# EAGLE board Ex Controller ExPwr USB Host (EAGLE 7.4.0)

Size 27 x 34 mm. Coordinates in mm from the lower left corner, seen from the top.
Outline: 0,0 27,0 27,34 0,34 0,0
Copper layers (1*16): Top 0.035mm / dielectric 1.5mm / Bottom 0.035mm
Design rules "default": minimum track width 10mil, minimum drill 24mil, track to track 8mil, track to pad 8mil, pad to pad 8mil, via to via 8mil, smd to smd 8mil, copper to edge 40mil, drill to drill 8mil, minimum pad ring 10mil, minimum via ring 8mil, stop-mask expansion 4mil, vias tented up to drill 0mil, thermal gap 10mil

## Footprints (pad centres in the part's own frame; a part is rotated, then mirrored left to right if it is on the bottom)
USB-FEMALE-A-PTH = drill 0.9: D+ 5.9,1.3; D- 7.9,1.3; GND 3.4,1.3; VBUS 10.4,1.3 | drill 3: GND@1 13.5,4; GND@2 0.3,4
1X02 = drill 1.016 long: 1 -1.27,0; 2 1.27,0
SOLDERJUMPER_REFLOW = smd 1.168 x 1.6: 1 -0.762,0; 2 0.762,0
1X10-BIG = drill 1.016 pad 1.778 octagon: 1 -11.43,0; 2 -8.89,0; 3 -6.35,0; 4 -3.81,0; 5 -1.27,0; 6 1.27,0; 7 3.81,0; 8 6.35,0; 9 8.89,0; 10 11.43,0
R0805 = smd 1.1 x 1.4: 1 -1,0; 2 1,0
SOT23-BEC = smd 1 x 1.4: B -0.95,-1.1; C 0,1.1; E 0.95,-1.1

## Placement (x,y rotation side)
EX_DEV_1  USB  [USB-FEMALE-A-PTH]  20.2,27.5 270 top
EX_DEV_2  USB  [USB-FEMALE-A-PTH]  6.8,13.5 90 top
EX_POWER_IN  [1X02]  1.8,8 90 top
EX_PWR_ON  [SOLDERJUMPER_REFLOW]  17.3,9.5 0 top
NUSBIO_IN  PINHD-1X10  [1X10-BIG]  13.5,1.5 180 top
NUSBIO_OUT  PINHD-1X10  [1X10-BIG]  13.5,32.5 180 top
R5  [R0805]  10.5,27.5 180 top
R6  [R0805]  16.5,27.5 180 top
T5  [SOT23-BEC]  11.2,21.5 180 top
T6  [SOT23-BEC]  15.3,21.5 180 top
USB_PWR_ON  [SOLDERJUMPER_REFLOW]  17.3,6.5 180 top

## Library data of the parts
EX_DEV_1 EX_DEV_2 = STUNTAZ
EX_POWER_IN = pinhead
EX_PWR_ON USB_PWR_ON = microbuilder
NUSBIO_IN NUSBIO_OUT R5 R6 = adafruit
T5 T6 = transistor

## Nets
CTRL_1_GND: EX_DEV_1.GND T5.C
CTRL_2_GND: EX_DEV_2.GND T6.C
EX_PWR_VCC: EX_POWER_IN.2 EX_PWR_ON.1
GND: EX_POWER_IN.1 NUSBIO_IN.10 NUSBIO_OUT.10 T5.E T6.E
GPIO0: NUSBIO_IN.1 NUSBIO_OUT.1
GPIO1: NUSBIO_IN.2 NUSBIO_OUT.2
GPIO2: NUSBIO_IN.3 NUSBIO_OUT.3
GPIO3: NUSBIO_IN.4 NUSBIO_OUT.4
GPIO4: NUSBIO_IN.5 NUSBIO_OUT.5
GPIO5: NUSBIO_IN.6 NUSBIO_OUT.6 R5.1
GPIO6: NUSBIO_IN.7 NUSBIO_OUT.7 R6.1
GPIO7: NUSBIO_IN.8 NUSBIO_OUT.8
N$2: R5.2 T5.B
N$3: R6.2 T6.B
TRAN_PWR: EX_DEV_1.VBUS EX_DEV_2.VBUS EX_PWR_ON.2 USB_PWR_ON.1
VCC: NUSBIO_IN.9 NUSBIO_OUT.9 USB_PWR_ON.2

## Tracks (layer width: path | path; a pad name or v marks a point on that pad's centre or on a via)
CTRL_1_GND  (1 unrouted)
CTRL_2_GND  (1 unrouted)
EX_PWR_VCC  (1 unrouted)
GND  (4 unrouted)
GPIO0  (1 unrouted)
GPIO1  (1 unrouted)
GPIO2  (1 unrouted)
GPIO3  (1 unrouted)
GPIO4  (1 unrouted)
GPIO5  (2 unrouted)
GPIO6  (2 unrouted)
GPIO7  (1 unrouted)
N$2  (1 unrouted)
N$3  (1 unrouted)
TRAN_PWR  (3 unrouted)
VCC  (2 unrouted)

## Text on the board
tNames: GND | VCC | 7 | 6* | 5* | 4 | 3 | 2 | 1 | 0 | Controller / Extension | Controller / Extension | + | 12 Volts Max | - | GND | VCC | 7 | 6 | 5 | 4 | 3 | 2 | 1 | 0
bNames: Transistor 2N3904 | PCBv5 FT 2016.5 USB HOST | MadeInTheUSB.net